# Altium PCB AEKISO60.PcbDoc (part 1 of 2)
Units mm, origin at the board's own origin, x right, y up, seen from the top; angles counter-clockwise.
Board outline 284.73 x 94.2 mm, 2 copper layers (Component Side, Bottom Layer), stack 1.571 mm thick; 190 components, 126 nets, 646 pads, 163 vias.
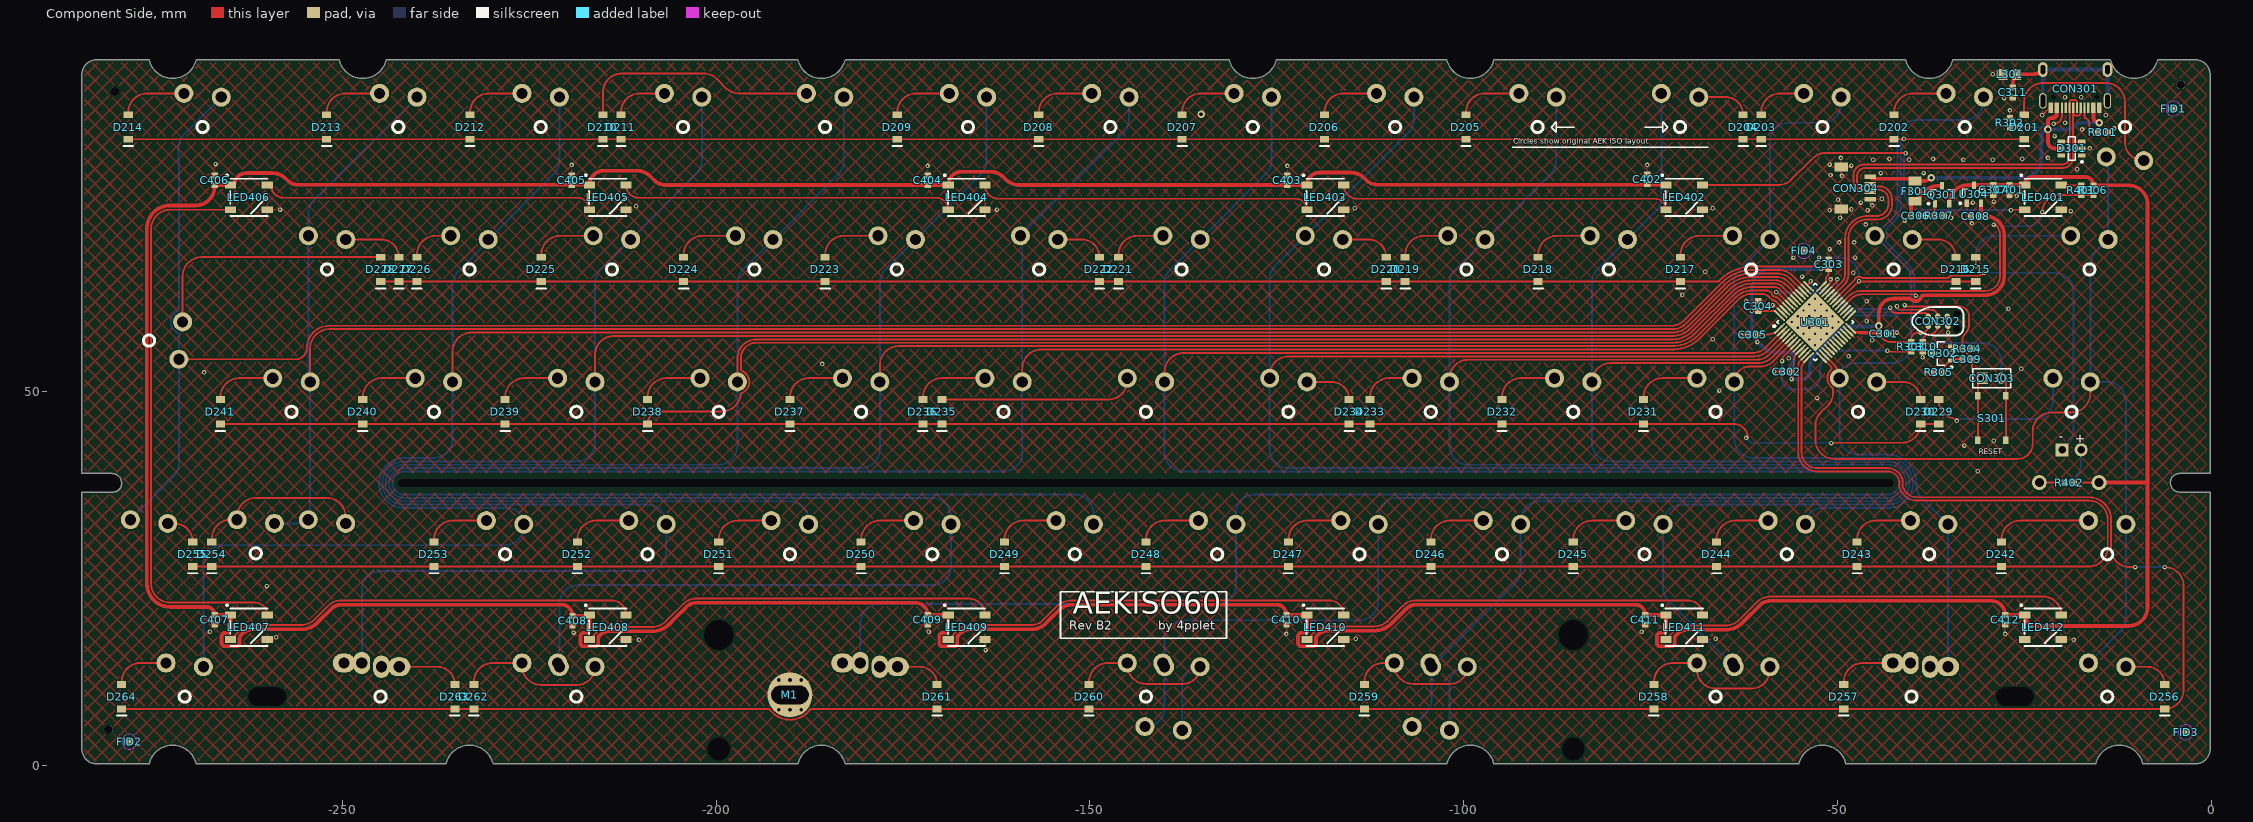
[diagram p0: Component Side view]
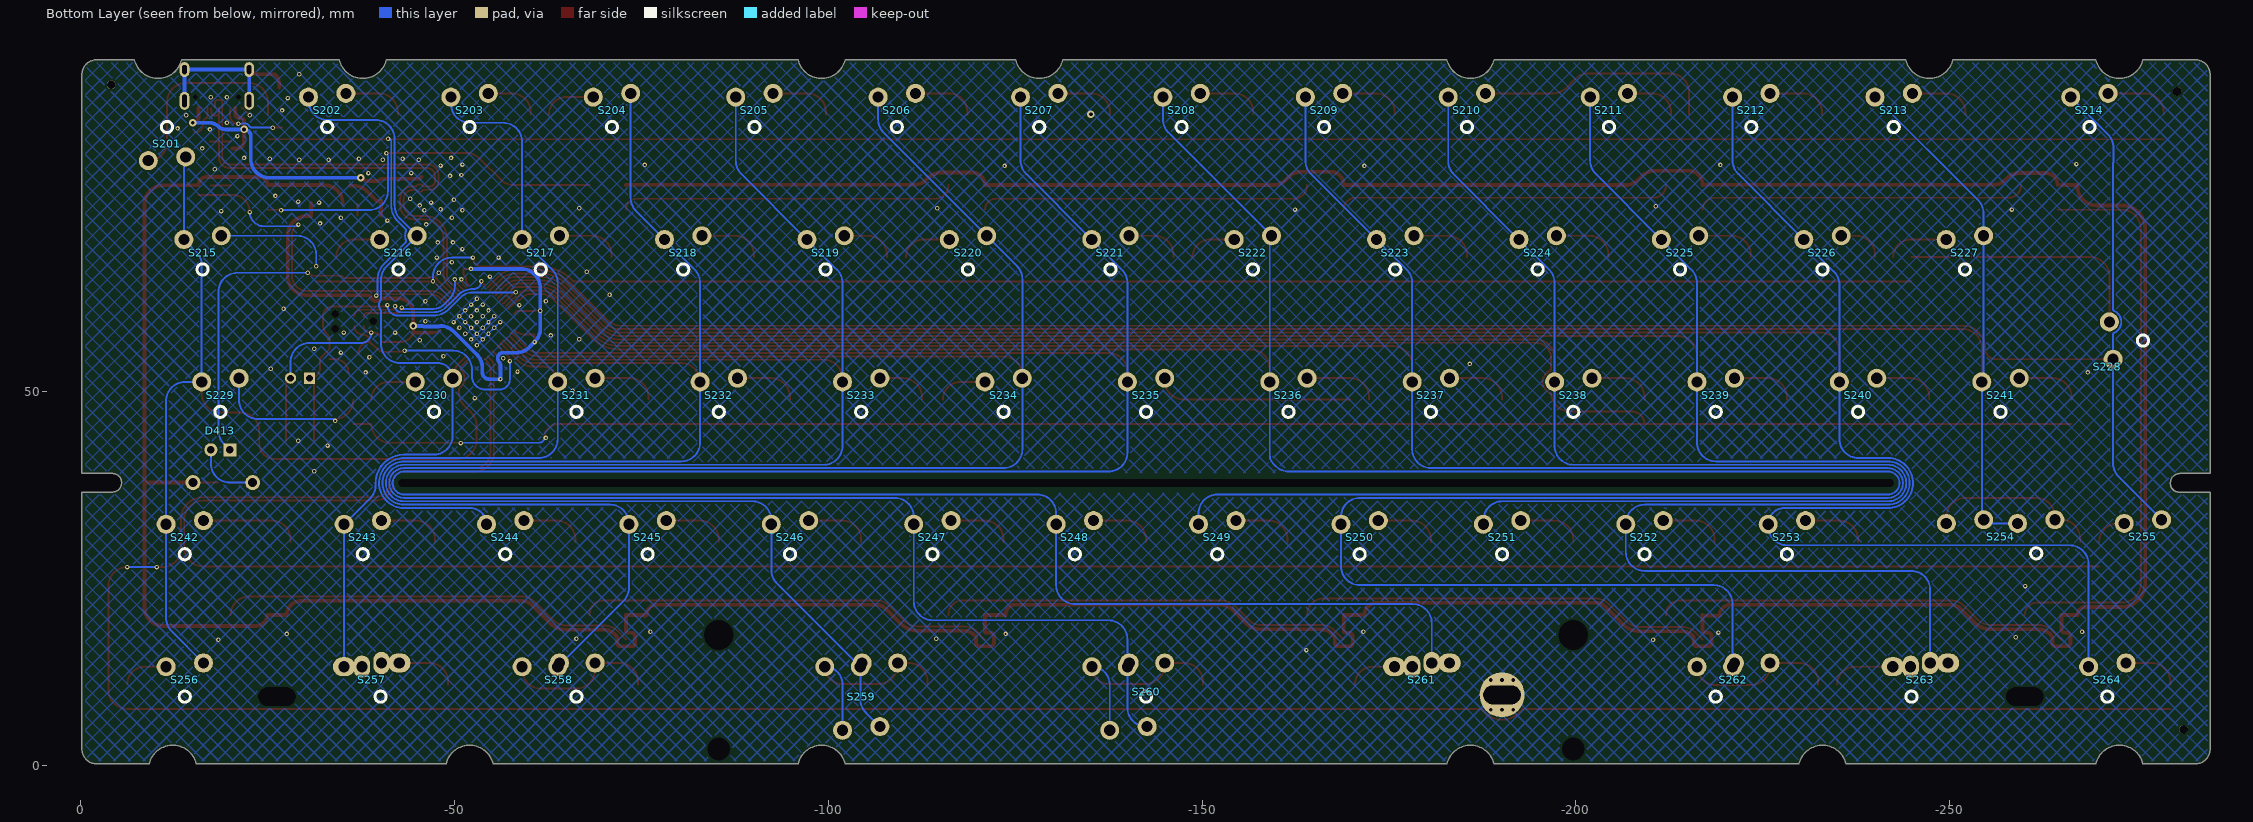
[diagram p1: Bottom Layer view, seen from below]
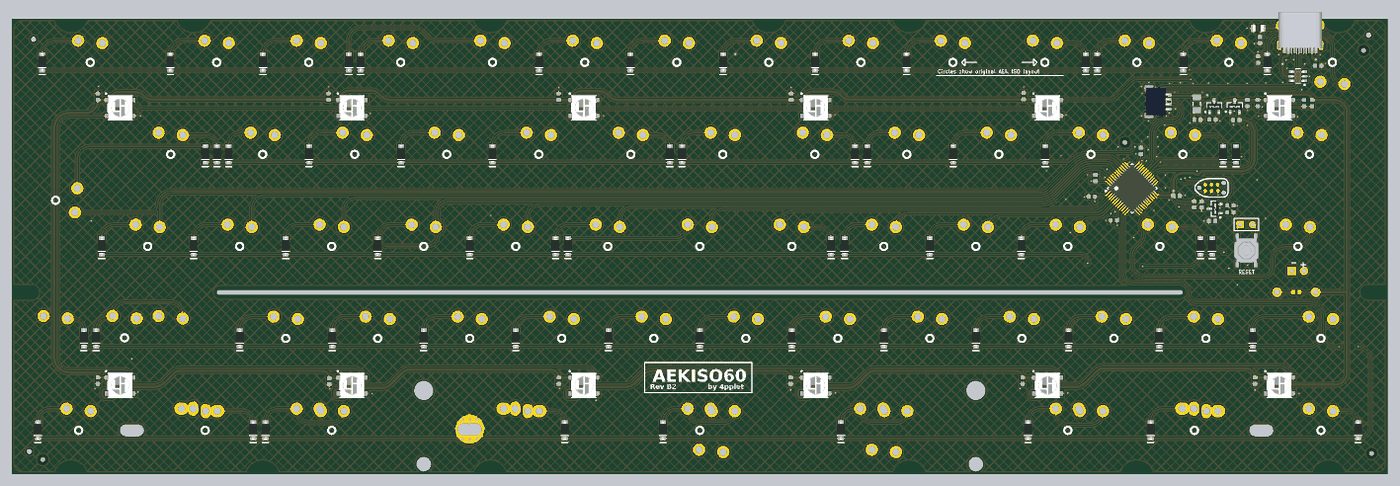
[diagram p3: 3D render of the assembled board from above, using the file's embedded part models]

## Layer stack, top to bottom
Top Solder: solder mask 0.0102, Solder Resist, Dk 3.5
Component Side: signal copper 0.0356
Dielectric 1: core 1.5, FR-4, Dk 4.2
Bottom Layer: signal copper 0.0356
Solder Side: solder mask 0.0102, Solder Resist, Dk 3.5

## Board outline
-284.85,2.215 ccw(c-282.85,2.215) -282.85,0.215 -275.85,0.215 cw(c-272.7,-0.52) -269.55,0.215 -236.137,0.215 cw(c-232.987,-0.52) -229.838,0.215 -189.05,0.215 cw(c-185.9,-0.52) -182.75,0.215 -102.25,0.215 cw(c-99.1,-0.52) -95.95,0.215 -55.161,0.215 cw(c-52.011,-0.52) -48.861,0.215 -15.45,0.215 cw(c-12.3,-0.52) -9.15,0.215 -2.15,0.215 ccw(c-2.15,2.215) -0.15,2.215 ccw(c-0.15,2.238) -0.127,2.238 -0.127,36.576 -4.191,36.576 cw(c-4.191,37.846) -5.461,37.846 cw(c-4.242,37.846) -4.242,39.065 -0.15,39.065 -0.15,92.415 ccw(c-2.15,92.415) -2.15,94.415 -7.177,94.415 cw(c-10.327,95.149) -13.477,94.415 -34.575,94.415 cw(c-37.724,95.149) -40.874,94.415 -95.95,94.415 cw(c-99.1,95.149) -102.25,94.415 -125.061,94.415 cw(c-128.211,95.149) -131.361,94.415 -182.75,94.415 cw(c-185.9,95.149) -189.05,94.415 -244.125,94.415 cw(c-247.274,95.149) -250.424,94.415 -269.55,94.415 cw(c-272.7,95.149) -275.85,94.415 -282.85,94.415 ccw(c-282.85,92.415) -284.85,92.415 -284.85,39.065 -280.797,39.065 cw(c-280.797,37.795) -279.527,37.795 -279.527,37.719 cw(c-280.67,37.719) -280.67,36.576 -284.861,36.576 -284.85,36.565

## Design rules (kind name [scope] priority, off if disabled: settings)
BoardOutlineClearance [All] p1: gap=0.254 ignorepadtopadclearanceinfootprint=FALSE except(0: Arc-SplitContinuation Track-SplitContinuation SMDPad-SplitContinuation THPad-SplitContinuation Via-SplitContinuation Fill-SplitContinuation Poly-SplitContinuation Region-SplitContinuation Text-SplitContinuation)
Clearance [All] p1: gap=0.2 ignorepadtopadclearanceinfootprint=FALSE except(0: Arc-Hole Track-Hole SMDPad-Hole THPad-Hole Via-Hole Fill-Hole Poly-Hole Region-Hole Text-Hole; 0.254: THPad-THPad THPad-Via THPad-Fill THPad-Poly THPad-Region THPad-Text Via-Via Via-Fill Via-Poly Via-Region Via-Text Fill-Fill Fill-Poly Fill-Region Fill-Text Poly-Poly Poly-Region Poly-Text Region-Region Region-Text Text-Text)
ComponentClearance [InComponent('No Component') And OnLayer('Component Side')] p1: gap=0.254 collisioncheckmode=3 verticalgap=0.254 showdistances=FALSE
DiffPairsRouting DiffPairsRouting_USB [InDifferentialPairClass('All Differential Pairs')] p1: maxlimit=0.254 minlimit=0.203 mostfreqgap=0.203 toplayer_minwidth=0.152 toplayer_maxwidth=0.381 toplayer_prefwidth=0.152 bottomlayer_minwidth=0.152 bottomlayer_maxwidth=0.381 bottomlayer_prefwidth=0.152 maxuncoupledlength=12.7
DiffPairsRouting [All] p2: maxlimit=0.254 minlimit=0.254 mostfreqgap=0.254 toplayer_minwidth=0.381 toplayer_maxwidth=0.381 toplayer_prefwidth=0.381 bottomlayer_minwidth=0.381 bottomlayer_maxwidth=0.381 bottomlayer_prefwidth=0.381 maxuncoupledlength=12.7
HoleSize [All] p1: absolutevalues=TRUE maxlimit=20 minlimit=0.025 maxpercent=80.000 minpercent=20.000
MatchedLengths MatchedLengths_USB_DiffPairs_1 [All] p1: tolerance=0.127 checknetsindiffpair=TRUE checkdiffpairvsdiffpair=FALSE checkxsignals=FALSE checkothers=FALSE
MatchedLengths MatchedLengths_USB_DiffPairs [All] p2: tolerance=0.127 checknetsindiffpair=TRUE checkdiffpairvsdiffpair=FALSE checkxsignals=FALSE checkothers=FALSE
PolygonConnect PolygonConnect_1 [All vs IsVia] p1: connectstyle=Direct reliefconductorwidth=0.254 reliefentries=4 polygonreliefangle="90 Angle" airgapwidth=0.254
PolygonConnect [All] p2: connectstyle=Relief reliefconductorwidth=0.254 reliefentries=4 polygonreliefangle="90 Angle" airgapwidth=0.254
RoutingVias [All] p1: holewidth=0.711 width=1.27 viastyle="Through Hole" minholewidth=0.711 minwidth=1.27 maxholewidth=0.711 maxwidth=1.27
SolderMaskExpansion [All] p1: expansion=0.102 istentingtop=FALSE
Width [All] p1: maxlimit=1 minlimit=0.203 preferedwidth=0.254 minimp=50.000000 maximp=50.000000 favimp=50.000000
27 further rules are at their usual default settings.

## Classes and differential pairs
component class Designator: C201 C202 C203 C204 C205 C206 D201 D202 D203 D204 D205 D206 D207 D208 D209 D210 D211 D212 D213 D214 D215 D216 D217 D218 D219 D220 D221 D222 D223 D224 D225 D226 D227 D228 D229 D230 D231 D232 D233 D234 D235 D236 D237 D238 D239 D240 D241 D242 D243 D244 D245 D246 D247 D248 D249 D250 D251 D252 D253 D254 D255 D256 D257 D258 D259 D260 D261 D262 D263 D264 D268 S201 S202 S203 S204 S205 S206 S207 S208 S209 S210 S211 S212 S213 S214 S215 S216 S217 S218 S219 S220 S221 S222 S223 S224 S225 S226 S227 S228 S229 S230 S231 S232 S233 S234 S235 S236 S237 S238 S239 S240 S241 S242 S243 S244 S245 S246 S247 S248 S249 S250 S251 S252 S253 S254 S255 S256 S257 S258 S259 S260 S261 S262 S263 S264 S271
differential pair D: +D_P -D_N

## Components (designator, comment, footprint, x,y, rotation, side; value= is the part's Value field where it differs from the comment)
C301 "" C0603[1608] -43.815,57.785 r180 top value=0.1uF
C302 "" C0603[1608] -56.769,52.705 r0 top value=0.1uF
C303 "" C0603[1608] -51.181,67.071 r270 top value=0.1uF
C304 "" C0603[1608] -60.579,61.468 r270 top value=0.1uF
C305 "" C0603[1608] -61.341,57.658 r0 top value=0.1uF
C306 "" C0603[1608] -39.497,73.533 r180 top value=4.7uF
C307 "" C0603[1608] -29.14,76.99 r90 top value=1uF
C308 "" C0603[1608] -31.468,73.491 r0 top value=0.1uF
C309 "" C0603[1608] -32.639,54.356 r180 top value=4.7uF
C310 "" C0603[1608] -38.608,56.007 r270 top value=470nF
C311 "" C0603[1608] -26.543,90.043 r90 top value=0.1uF
C401 "" C0603[1608] -26.981,76.99 r90 top value=0.1uF
C402 "" C0603[1608] -75.443,78.43 r270 top value=0.1uF
C403 "" C0603[1608] -123.576,78.303 r270 top value=0.1uF
C404 "" C0603[1608] -171.709,78.303 r270 top value=0.1uF
C405 "" C0603[1608] -219.334,78.303 r270 top value=0.1uF
C406 "" C0603[1608] -267.086,78.303 r270 top value=0.1uF
C407 "" C0603[1608] -267.086,19.502 r90 top value=0.1uF
C408 "" C0603[1608] -219.207,19.375 r90 top value=0.1uF
C409 "" C0603[1608] -171.709,19.502 r90 top value=0.1uF
C410 "" C0603[1608] -123.703,19.502 r90 top value=0.1uF
C411 "" C0603[1608] -75.697,19.502 r90 top value=0.1uF
C412 "" C0603[1608] -27.564,19.502 r90 top value=0.1uF
CON301 "TYPE-C-31-M-12" TYPE-C-31-M-12 -18.2,88 r180 top locked
CON302 "TC2030-IDC" TC2030-IDC-NL -36.576,59.436 r0 top locked
CON303 "Header 2" HDR1X2 -30.607,51.816 r0 top
CON304 "Header 5" "JST SM04B-SRSS-TB" -49.5,77.25 r270 top
D201 "Diode" SOD-123 -25.019,85.415 r90 top
D202 "Diode" SOD-123 -42.418,85.415 r90 top
D203 "Diode" SOD-123 -60.198,85.415 r90 top
D204 "Diode" SOD-123 -62.611,85.415 r90 top
D205 "Diode" SOD-123 -99.695,85.415 r90 top
D206 "Diode" SOD-123 -118.618,85.415 r90 top
D207 "Diode" SOD-123 -137.668,85.415 r90 top
D208 "Diode" SOD-123 -156.845,85.415 r90 top
D209 "Diode" SOD-123 -175.768,85.415 r90 top
D210 "Diode" SOD-123 -215.138,85.415 r90 top
D211 "Diode" SOD-123 -212.725,85.415 r90 top
D212 "Diode" SOD-123 -232.918,85.415 r90 top
D213 "Diode" SOD-123 -252.095,85.415 r90 top
D214 "Diode" SOD-123 -278.638,85.415 r90 top
D215 "Diode" SOD-123 -31.496,66.365 r90 top
D216 "Diode" SOD-123 -34.163,66.365 r90 top
D217 "Diode" SOD-123 -70.993,66.365 r90 top
D218 "Diode" SOD-123 -90.043,66.365 r90 top
D219 "Diode" SOD-123 -107.823,66.365 r90 top
D220 "Diode" SOD-123 -110.363,66.365 r90 top
D221 "Diode" SOD-123 -146.177,66.365 r90 top
D222 "Diode" SOD-123 -148.717,66.365 r90 top
D223 "Diode" SOD-123 -185.42,66.365 r90 top
D224 "Diode" SOD-123 -204.343,66.365 r90 top
D225 "Diode" SOD-123 -223.393,66.365 r90 top
D226 "Diode" SOD-123 -240.03,66.365 r90 top
D227 "Diode" SOD-123 -242.443,66.365 r90 top
D228 "Diode" SOD-123 -244.856,66.365 r90 top
D229 "Diode" SOD-123 -36.449,47.315 r90 top
D230 "Diode" SOD-123 -38.862,47.315 r90 top
D231 "Diode" SOD-123 -75.946,47.315 r90 top
D232 "Diode" SOD-123 -94.869,47.315 r90 top
D233 "Diode" SOD-123 -112.522,47.315 r90 top
D234 "Diode" SOD-123 -115.316,47.315 r90 top
D235 "Diode" SOD-123 -169.799,47.315 r90 top
D236 "Diode" SOD-123 -172.339,47.315 r90 top
D237 "Diode" SOD-123 -190.119,47.315 r90 top
D238 "Diode" SOD-123 -209.169,47.315 r90 top
D239 "Diode" SOD-123 -228.219,47.315 r90 top
D240 "Diode" SOD-123 -247.269,47.315 r90 top
D241 "Diode" SOD-123 -266.319,47.315 r90 top
D242 "Diode" SOD-123 -28.067,28.265 r90 top
D243 "Diode" SOD-123 -47.371,28.265 r90 top
D244 "Diode" SOD-123 -66.167,28.265 r90 top
D245 "Diode" SOD-123 -85.344,28.265 r90 top
D246 "Diode" SOD-123 -104.394,28.265 r90 top
D247 "Diode" SOD-123 -123.444,28.265 r90 top
D248 "Diode" SOD-123 -142.494,28.265 r90 top
D249 "Diode" SOD-123 -161.417,28.265 r90 top
D250 "Diode" SOD-123 -180.594,28.265 r90 top
D251 "Diode" SOD-123 -199.644,28.265 r90 top
D252 "Diode" SOD-123 -218.567,28.265 r90 top
D253 "Diode" SOD-123 -237.744,28.265 r90 top
D254 "Diode" SOD-123 -267.462,28.265 r90 top
D255 "Diode" SOD-123 -270.002,28.265 r90 top
D256 "Diode" SOD-123 -6.223,9.215 r90 top
D257 "Diode" SOD-123 -49.149,9.215 r90 top
D258 "Diode" SOD-123 -74.549,9.215 r90 top
D259 "Diode" SOD-123 -113.284,9.215 r90 top
D260 "Diode" SOD-123 -150.114,9.215 r90 top
D261 "Diode" SOD-123 -170.434,9.215 r90 top
D262 "Diode" SOD-123 -232.41,9.215 r90 top
D263 "Diode" SOD-123 -234.95,9.215 r90 top
D264 "Diode" SOD-123 -279.527,9.215 r90 top
D301 "SRV05" SOT-23-6 -18.669,82.55 r180 top
D413 "LED0" "SWITCH_LED - 1U" -18.675,47.315 r180 bottom
F301 "Fuse Thermal" C1206[3216] -39.624,76.835 r90 top
FID1 "Plug" FIDUCIAL_NORDIC -5.08,87.884 r270 top
FID2 "Plug" FIDUCIAL_NORDIC -278.511,3.175 r270 top
FID3 "Plug" FIDUCIAL_NORDIC -3.429,4.445 r270 top
FID4 "Plug" Fiducial_Nordic -54.483,68.834 r90 top
L301 "Inductor" L0805 -26.924,92.456 r0 top
LED401 "WS2812B" WS2812B -22.5,76 r0 top
LED402 "WS2812B" WS2812B -70.499,76 r0 top
LED403 "WS2812B" WS2812B -118.499,76 r0 top
LED404 "WS2812B" WS2812B -166.499,76 r0 top
LED405 "WS2812B" WS2812B -214.499,76 r0 top
LED406 "WS2812B" WS2812B -262.499,76 r0 top
LED407 "WS2812B" WS2812B -262.499,18.5 r0 top
LED408 "WS2812B" WS2812B -214.499,18.5 r0 top
LED409 "WS2812B" WS2812B -166.499,18.5 r0 top
LED410 "WS2812B" WS2812B -118.499,18.5 r0 top
LED411 "WS2812B" WS2812B -70.499,18.5 r0 top
LED412 "WS2812B" WS2812B -22.5,18.5 r0 top
M1 "Socket" mounting_hole -190.119,9.45 r0 top
Q301 "PMOS-2" SOT-23-3 -35.998,76.355 r90 top
Q302 "2N7002 NMOS" SOT-23-3 -35.941,55.118 r180 top
R301 "Res1" R0603[1608] -14.478,84.709 r0 top value=5k1
R302 "Res1" R0603[1608] -26.924,85.979 r90 top value=5k1
R303 "Res1" R0603[1608] -40.132,56.007 r270 top value=10K
R304 "Res1" R0603[1608] -32.639,55.753 r0 top value=10K
R305 "Res1" R0603[1608] -36.449,52.578 r180 top value=100K
R306 "Res1" R0603[1608] -15.748,76.962 r270 top value=10K
R307 "Res1" R0603[1608] -36.379,73.561 r0 top value=10K
R401 "Res1" R0603[1608] -17.399,76.962 r90 top value=470R
R402 "Res1" "R0603[1608] - THT" -19,37.846 r0 top value=470R
S201 "MX" "ALPS-switch - 1.25U - switched pol" -11.531,85.415 r0 bottom locked
S202 "MX" "Alps-switch - switched pol" -32.962,85.415 r180 bottom locked
S203 "MX" Alps-switch -52.012,85.415 r180 bottom locked
S204 "MX" Alps-switch -71.062,85.415 r180 bottom locked
S205 "MX" Alps-switch -90.112,85.415 r180 bottom locked
S206 "MX" "Alps-switch - switched pol" -109.162,85.415 r180 bottom locked
S207 "MX" Alps-switch -128.212,85.415 r180 bottom locked
S208 "MX" "Alps-switch - switched pol" -147.262,85.415 r180 bottom locked
S209 "MX" Alps-switch -166.312,85.415 r180 bottom locked
S210 "MX" "Alps-switch - switched pol" -185.42,85.415 r180 bottom locked
S211 "MX" Alps-switch -204.412,85.415 r180 bottom locked
S212 "MX" "Alps-switch - switched pol" -223.462,85.415 r180 bottom locked
S213 "MX" Alps-switch -242.512,85.415 r180 bottom locked
S214 "MX" "ALPS-switch - 1.25U - switched pol" -268.692,85.415 r180 bottom locked
S215 "MX" "ALPS-switch - 1.25U" -16.293,66.365 r180 bottom locked
S216 "MX" Alps-switch -42.487,66.365 r180 bottom locked
S217 "MX" Alps-switch -61.537,66.365 r180 bottom locked
S218 "MX" "Alps-switch - switched pol" -80.587,66.365 r180 bottom locked
S219 "MX" Alps-switch -99.637,66.365 r180 bottom locked
S220 "MX" Alps-switch -118.687,66.365 r180 bottom locked
S221 "MX" Alps-switch -137.737,66.365 r180 bottom locked
S222 "MX" Alps-switch -156.787,66.365 r180 bottom locked
S223 "MX" Alps-switch -175.837,66.365 r180 bottom locked
S224 "MX" "Alps-switch - switched pol" -194.887,66.365 r180 bottom locked
S225 "MX" Alps-switch -213.937,66.365 r180 bottom locked
S226 "MX" "Alps-switch - switched pol" -232.987,66.365 r180 bottom locked
S227 "MX" Alps-switch -252.037,66.365 r180 bottom locked
S228 "MX" "ALPS-SWITCH - ENTER - AEKISO" -263.95,47.315 r180 bottom locked
S229 "MX" "ALPS-switch - 2U - no stab" -18.675,47.315 r180 bottom locked
S230 "MX" Alps-switch -47.25,47.315 r180 bottom locked
S231 "MX" Alps-switch -66.3,47.315 r180 bottom locked
S232 "MX" "Alps-switch - switched pol" -85.35,47.315 r180 bottom locked
S233 "MX" Alps-switch -104.4,47.315 r180 bottom locked
S234 "MX" "Alps-switch - switched pol" -123.45,47.315 r180 bottom locked
S235 "MX" "Alps-switch - switched pol" -142.5,47.315 r180 bottom locked
S236 "MX" Alps-switch -161.55,47.315 r180 bottom locked
S237 "MX" "Alps-switch - switched pol" -180.6,47.315 r180 bottom locked
S238 "MX" "Alps-switch - switched pol" -199.65,47.315 r180 bottom locked
S239 "MX" Alps-switch -218.7,47.315 r180 bottom locked
S240 "MX" "Alps-switch - switched pol" -237.75,47.315 r180 bottom locked
S241 "MX" Alps-switch -256.8,47.315 r180 bottom locked
S242 "MX" "ALPS-switch - 1.5U" -13.912,28.265 r180 bottom
S243 "MX" "Alps-switch - switched pol" -37.725,28.265 r180 bottom locked
S244 "MX" "Alps-switch - switched pol" -56.775,28.265 r180 bottom locked
S245 "MX" Alps-switch -75.825,28.265 r180 bottom locked
S246 "MX" "Alps-switch - switched pol" -94.875,28.265 r180 bottom locked
S247 "MX" Alps-switch -113.925,28.265 r180 bottom locked
S248 "MX" "Alps-switch - switched pol" -132.975,28.265 r180 bottom locked
S249 "MX" "Alps-switch - switched pol" -152.025,28.265 r180 bottom locked
S250 "MX" "Alps-switch - switched pol" -171.075,28.265 r180 bottom locked
S251 "MX" "Alps-switch - switched pol" -190.125,28.265 r180 bottom locked
S252 "MX" "Alps-switch - switched pol" -209.175,28.265 r180 bottom locked
S253 "MX" Alps-switch -228.225,28.265 r180 bottom locked
S254 "MX" "ALPS-switch - AEKISO r_shift" -261.58,28.385 r180 bottom
S255 "MX" Alps-switch -275.85,28.385 r180 bottom locked
S256 "MX" "Alps-switch - switched pol" -13.912,9.215 r180 bottom locked
S257 "MX" "ALPS-switch - L_WIN - AEKISO60" -37.724,9.215 r180 bottom locked
S258 "MX" "ALPS-switch - L_alt - AEKISO60" -61.537,9.215 r180 bottom locked
S259 "MX" "ALPS-SWITCH - L SPLIT SPACE - AEKISO60" -102.018,9.215 r0 bottom locked
S260 "MX" "ALPS-SWITCH - SPACE - AEKISO60" -142.499,9.215 r180 bottom locked
S261 "MX" "ALPS-switch - R split space - AEKISO60" -163.931,9.215 r0 bottom locked
S262 "MX" "ALPS-switch - R_alt - AEKISO60" -223.462,9.215 r180 bottom locked
S263 "MX" "ALPS-SWITCH - R_WIN - AEKISO60" -247.274,9.215 r180 bottom locked
S264 "MX" "ALPS-switch - 1.25U - switched pol" -271.087,9.215 r180 bottom locked
S301 "SW-PB" "XKB Switch" -29.337,46.482 r270 top
U301 "STM32F072/F303_LQFP48" "STM32 - COMBO 7X7MM" -52.986,59.33 r45 top locked
U304 "XC6206P332MR" SOT-23-3 -31.75,76.397 r90 top

## Footprints (in the part's own frame and the unit in brackets; to place one, negate y for a bottom-side part, rotate by r counter-clockwise, add the part's x,y. Pads: shape width x height; smd on the part's side, far side on the other; paste and mask are expansions set on the pad)
Alps-switch [mm]
  round 2.54 hole 1.499 mask+0.102: 1(-2.5,4) 2(2.5,4.5)
  round 1 on Mech14: ""(0,0)
"ALPS-switch - 1.5U" [mm]
  round 2.54 hole 1.499 mask+0.102: 1(-2.5,4) 2(2.5,4.5)
  round 1 on Mech14: ""(0,0)
"ALPS-switch - 1.25U" [mm]
  round 2.54 hole 1.499 mask+0.102: 1(-2.5,4) 2(2.5,4.5)
  round 1 on Mech14: ""(0,0)
"ALPS-switch - 1.25U - switched pol" [mm]
  round 2.54 hole 1.499 mask+0.102: 1(2.5,4.5) 2(-2.5,4)
  round 1 on Mech14: ""(0,0)
"ALPS-switch - 2U - no stab" [mm]
  round 2.54 hole 1.499 mask+0.102: 1(-2.5,4) 2(2.5,4.5)
  round 1 on Mech14: ""(0,0)
"ALPS-switch - AEKISO r_shift" [mm]
  round 2.54 hole 1.499 mask+0.102: 1(-12.025,4) 1(2.5,4.5) 2(-7.025,4.5) 2(-2.5,4)
  round 1 on Mech14: ""(-9.525,0) ""(0,0)
"ALPS-SWITCH - ENTER - AEKISO" [mm]
  round 2.54 hole 1.499 mask+0.102: 1(7.411,12.03) 2(7.911,7.03)
  round 1 on Mech14: ""(0,0) ""(9.53,9.53) ""(11.911,9.53) ""(14.293,9.53)
"ALPS-SWITCH - L SPLIT SPACE - AEKISO60" [mm]
  round 2.54 hole 1.499 mask+0.102: 1(-4.881,4) 1(-2.5,-4.5) 1(-2.262,-4) 2(-7.263,-4.5) 2(0.119,4.5) 2(2.5,-4)
  round 1 on Mech14: ""(-4.763,0) ""(-2.381,0) ""(0,0)
"ALPS-switch - L_alt - AEKISO60" [mm]
  round 2.54 hole 1.499 mask+0.102: 1(-2.5,4) 1(7.263,4.5) 2(2.262,4) 2(2.5,4.5)
  round 1 on Mech14: ""(0,0) ""(4.763,0)
"ALPS-switch - L_WIN - AEKISO60" [mm]
  oval 3x2.54 hole 1.499 mask+0.102: 1(-2.5,4) 2(4.881,4.5)
  oval 2.2x3 hole 1.499 mask+0.102: 1(-0.119,4) 2(2.5,4.5)
  round 1 on Mech14: ""(0,0) ""(2.381,0)
"ALPS-switch - R split space - AEKISO60" [mm]
  oval 2.2x3 hole 1.499 mask+0.102: 1(-14.169,-4) 2(-16.788,-4.5)
  oval 3x2.54 hole 1.499 mask+0.102: 1(-11.787,-4) 2(-19.169,-4.5)
  round 1 on Mech14: ""(-16.669,0) ""(-14.287,0)
"ALPS-switch - R_alt - AEKISO60" [mm]
  round 2.54 hole 1.499 mask+0.102: 1(-7.263,4) 1(2.5,4.5) 2(-2.5,4) 2(-2.262,4.5)
  round 1 on Mech14: ""(-4.763,0) ""(0,0)
"ALPS-SWITCH - R_WIN - AEKISO60" [mm]
  oval 3x2.54 hole 1.499 mask+0.102: 1(-4.881,4) 2(2.5,4.5)
  oval 2.2x3 hole 1.499 mask+0.102: 1(-2.5,4) 2(0.119,4.5)
  round 1 on Mech14: ""(-2.381,0) ""(0,0)
"ALPS-SWITCH - SPACE - AEKISO60" [mil]
  round 100 hole 59 mask+4: 1(-98.43,157.48) 1(-88.48,177.17) 1(5.56,-157.48) 2(-285.33,157.48) 2(-191.29,-177.17) 2(98.43,177.17)
  round 60 hole 120 unplated: ""(-2250,-275) ""(2250,-275)
  round 60 hole 157.01 unplated: ""(-2250,325) ""(2250,325)
  round 39.37 on Mech14: ""(-186.91,0) ""(-92.86,0) ""(0,0)
"Alps-switch - switched pol" [mm]
  round 2.54 hole 1.499 mask+0.102: 1(2.5,4.5) 2(-2.5,4)
  round 1 on Mech14: ""(0,0)
C0603[1608] [mm] "Chip Resistor, 2-Leads, Body 1,57x0,80mm, IPC Medium Density"
  rect 0.8x0.85 smd: 1(-0.65,0) 2(0.65,0)
  body extent -0.83,-0.43 0.82,0.43, height 0.5
C1206[3216] [mm]
  rect 1.2x1.8 smd: 1(-1.35,0) 2(1.35,0)
  silkscreen extent -0.35,-0.8 0.35,0.8, body extent -1.6,-0.9 1.6,0.9, height 1.2
FIDUCIAL_NORDIC [mm]
  round 1 smd paste+0 mask+0.5: 0(0,0)
  Component Side keep-out circle w0.01: c0,0 r1
Fiducial_Nordic [mm]
  round 1 smd paste+0 mask+0.5: 0(0,0)
  Component Side keep-out circle w0.01: c0,0 r1
HDR1X2 [mm] "Connector; Header; 2 Position"
  rect 1.5x1.5 hole 0.9 mask+0.102: 1(0,0)
  round 1.5 hole 0.9 mask+0.102: 2(2.54,0)
  silkscreen extent -1.27,-1.27 3.81,1.27
"JST SM04B-SRSS-TB" [mm]
  rect 0.6x1.55 smd: 1(-1.5,3.875) 2(-0.5,3.875) 3(0.5,3.875) 4(1.5,3.875)
  rect 1.2x1.8 smd: 5(-2.8,0) 5(2.8,0)
  body extent -3.01,-0.76 2.99,4.19, height 2.96
L0805 [mm] "based on Sunlord-GZ2012D101TF_C1015 datasheet"
  rect 1.16x1.47 smd: 1(-0.92,0) 2(0.92,0)
  body extent -1.15,-0.72 1.15,0.72, height 1.02
mounting_hole [mm]
  round 1 hole 0.5 paste+0 mask+0: 1(-1.5,-2) 1(-1.5,2) 1(0,-2) 1(0,2) 1(1.5,-2) 1(1.5,2)
  round 6 hole 2.5 slot 5 at 0 deg: 1(0,0)
R0603[1608] [mm] "Chip Resistor, 2-Leads, Body 1,57x0,80mm, IPC Medium Density"
  rect 0.8x0.85 smd: 1(-0.65,0) 2(0.65,0)
  body extent -0.83,-0.43 0.82,0.43, height 0.5
"R0603[1608] - THT" [mm] "Chip Resistor, 2-Leads, Body 1,57x0,80mm, IPC Medium Density"
  round 2 hole 1.2: 1(-4,0) 2(4,0)
  rect 0.8x0.85 smd paste-6: 1(-0.65,0) 2(0.65,0)
SOD-123 [mm]
  rect 0.91x1.22 smd: 1(1.635,0) 2(-1.635,0)
  silkscreen extent -2.54,-0.64 -2.54,0.63, body extent -1.87,-0.85 1.88,0.85, height 1.2
SOT-23-3 [mm] "3.3v regulator, used in Windsond S2 proto 1"
  rect 1x0.55 smd: 1(-1.2,0.95) 2(-1.2,-0.95) 3(1.2,0)
  silkscreen extent -1.32,-1.55 0.7,1.95, body extent -1.45,-1.5 1.1,1.5, height 1
SOT-23-6 [mm]
  rect 1x0.55 smd: 1(-1.375,0.95) 2(-1.375,0) 3(-1.375,-0.95) 4(1.375,-0.95) 5(1.375,0) 6(1.375,0.95)
  silkscreen extent -1.5,-1.55 0.46,1.92, body extent -1.37,-1.44 1.47,1.49, height 1.05
"STM32 - COMBO 7X7MM" [mm] "LQFP48, 7x7mm"
  oval 1.45x0.3 smd paste-5: 1(-4.225,2.75) 2(-4.225,2.25) 3(-4.225,1.75) 4(-4.225,1.25) 5(-4.225,0.75) 6(-4.225,0.25) 7(-4.225,-0.25) 8(-4.225,-0.75) 9(-4.225,-1.25) 10(-4.225,-1.75) 11(-4.225,-2.25) 12(-4.225,-2.75) 25(4.225,-2.75) 26(4.225,-2.25) 27(4.225,-1.75) 28(4.225,-1.25) 29(4.225,-0.75) 30(4.225,-0.25) 31(4.225,0.25) 32(4.225,0.75) 33(4.225,1.25) 34(4.225,1.75) 35(4.225,2.25) 36(4.225,2.75)
  oval 0.8x0.25 smd: 1(-3.4,2.75) 2(-3.4,2.25) 3(-3.4,1.75) 4(-3.4,1.25) 5(-3.4,0.75) 6(-3.4,0.25) 7(-3.4,-0.25) 8(-3.4,-0.75) 9(-3.4,-1.25) 10(-3.4,-1.75) 11(-3.4,-2.25) 12(-3.4,-2.75) 25(3.4,-2.75) 26(3.4,-2.25) 27(3.4,-1.75) 28(3.4,-1.25) 29(3.4,-0.75) 30(3.4,-0.25) 31(3.4,0.25) 32(3.4,0.75) 33(3.4,1.25) 34(3.4,1.75) 35(3.4,2.25) 36(3.4,2.75)
  oval 0.25x0.8 smd: 13(-2.75,-3.4) 14(-2.25,-3.4) 15(-1.75,-3.4) 16(-1.25,-3.4) 17(-0.75,-3.4) 18(-0.25,-3.4) 19(0.25,-3.4) 20(0.75,-3.4) 21(1.25,-3.4) 22(1.75,-3.4) 23(2.25,-3.4) 24(2.75,-3.4) 37(2.75,3.4) 38(2.25,3.4) 39(1.75,3.4) 40(1.25,3.4) 41(0.75,3.4) 42(0.25,3.4) 43(-0.25,3.4) 44(-0.75,3.4) 45(-1.25,3.4) 46(-1.75,3.4) 47(-2.25,3.4) 48(-2.75,3.4)
  oval 0.3x1.45 smd paste-5: 13(-2.75,-4.225) 14(-2.25,-4.225) 15(-1.75,-4.225) 16(-1.25,-4.225) 17(-0.75,-4.225) 18(-0.25,-4.225) 19(0.25,-4.225) 20(0.75,-4.225) 21(1.25,-4.225) 22(1.75,-4.225) 23(2.25,-4.225) 24(2.75,-4.225) 37(2.75,4.225) 38(2.25,4.225) 39(1.75,4.225) 40(1.25,4.225) 41(0.75,4.225) 42(0.25,4.225) 43(-0.25,4.225) 44(-0.75,4.225) 45(-1.25,4.225) 46(-1.75,4.225) 47(-2.25,4.225) 48(-2.75,4.225)
  rect 5.6x5.6 smd: 47(0,0)
  silkscreen extent -4.43,-3.65 3.65,3.65, body extent -3.52,-3.52 3.52,3.52, height 0.5
"SWITCH_LED - 1U" [mm]
  round 1.75 hole 1 mask+0.102: 1(-1.27,-5.08)
  rect 1.75x1.75 hole 1 mask+0.102: 2(1.27,-5.08)
  round 1 on Mech14: ""(0,0)
TC2030-IDC-NL [mm] "Tag-Connect 6-Pin with No Legs (PN# TC2030-IDC-NL)"
  round 0.9 hole 0.995 unplated: 0(-2.54,0) 0(2.54,-1.016) 0(2.54,1.016)
  round 0.79 smd paste-0.39: 1(-1.27,-0.635) 2(-1.27,0.635) 3(0,-0.635) 4(0,0.635) 5(1.35,-0.635) 6(1.27,0.635)
  silkscreen extent -3.43,-1.91 3.43,1.9
TYPE-C-31-M-12 [mm]
  rect 0.6x1.45 smd: A1B12(-3.25,0) A4B9(-2.45,0) B1A12(3.25,0) B4A9(2.45,0)
  rect 0.3x1.45 smd: A5(-1.25,0) A6(-0.25,0) A7(0.25,0) A8(1.25,0) B5(1.75,0) B6(0.75,0) B7(-0.75,0) B8(-1.75,0)
  oval 1x2.1 / inner oval 1.3x2.4 / far side oval 1.3x2.4 hole 0.6 slot 1.7 at 90 deg: S1(-4.32,-0.915) S1(4.32,-0.915)
  oval 1.3x2 hole 0.6 slot 1.2 at 90 deg: S1(-4.32,-5.095) S1(4.32,-5.095)
  round 0 hole 0.65 unplated: ""(-2.89,-1.445) ""(2.89,-1.445)
  body extent -4.47,-7.72 4.47,0.18, height 3.21
WS2812B [mm]
  rect 1.5x0.9 smd: 1(-2.45,1.65) 2(-2.45,-1.65) 3(2.45,-1.65) 4(2.45,1.65)
  silkscreen extent -3.05,-2.5 2.5,3.07, body extent -2.65,-2.45 2.7,2.5, height 1.5
"XKB Switch" [mm] "XKB Enterprise TS-1187A-C-D-B"
  rect 1x0.75 smd: 1(-3,1.875) 1(3,1.875) 2(-3,-1.875) 2(3,-1.875)
  body extent -3.25,-2.55 3.25,2.55, height 2

## Part data
C301 C302 C303 C304 C305 C308 C311 C401 C402 C403 C404 C405 C406 C407 C408 C409 C410 C411 C412: library part Cap, "Capacitor", LCSC MFG=YAGEO, LCSC Part #=C14663, MRF.Part=CC0603KRX7R9BB104, Version="0603 imperial"
C306 C309: library part Cap, "Capacitor", LCSC MFG="Samsung Electro-Mechanics", LCSC Part #=C19666, MRF.Part=CL10A475KO8NNNC, Version="0603 imperial"
C307: library part Cap, "Capacitor", LCSC MFG="Samsung Electro-Mechanics", LCSC Part #=C15849, MRF.Part=CL10A105KB8NNNC, Version="0603 imperial"
C310: library part Cap, "Capacitor", LCSC MFG="Samsung Electro-Mechanics", LCSC Part #=C1623, MRF.Part=CL10B474KA8NNNC, Version="0603 imperial"
CON301: LCSC MFG="Korean Hroparts Elec", LCSC Part #=C165948, MRF.Part=TYPE-C-31-M-12
CON302: library part "Header 3X2", "Header, 3-Pin, Dual row"
CON303: "Header, 2-Pin"
CON304: "JST for USB daughter board", LCSC MFG="JST Sales America", LCSC Part #=C160404, MRF.Part=SM04B-SRSS-TB(LF)(SN)
D201 D202 D203 D204 D205 D206 D207 D208 D209 D210 D211 D212 D213 D214 D215 D216 D217 D218 D219 D220 D221 D222 D223 D224 D225 D226 D227 D228 D229 D230 D231 D232 D233 D234 D235 D236 D237 D238 D239 D240 D241 D242 D243 D244 D245 D246 D247 D248 D249 D250 D251 D252 D253 D254 D255 D256 D257 D258 D259 D260 D261 D262 D263 D264: "Default Diode", LCSC MFG=ST(Semtech), LCSC Part #=C81598, MRF.Part=1N4148W, Version=SOD-123
D301: LCSC MFG="ProTek Devices", LCSC Part #=C85364, MRF.Part=SRV05-4-P-T7
D413: "Typical INFRARED GaAs LED"
F301: "Thermal Fuse", LCSC MFG="Shenzhen JDT Fuse", LCSC Part #=C135338, MRF.Part=ASMD1206-050
L301: LCSC MFG=Sunlord, LCSC Part #=C1015, MRF.Part=GZ2012D101TF, Version="0806 imperial"
LED401 LED402 LED403 LED404 LED405 LED406 LED407 LED408 LED409 LED410 LED411 LED412: LCSC MFG=Worldsemi, LCSC Part #=C2920042, MRF.Part=WS2812E-V5
Q301: "P-Channel Power MOSFET", LCSC MFG="Vishay Intertech", LCSC Part #=C10487, MRF.Part=SI2301CDS-T1-GE3, Version=SOT23-3
Q302: library part MOSFET-N, "N-Channel MOSFET", LCSC MFG="Changjiang Electronics Tech (CJ)", LCSC Part #=C8545, MRF.Part=2N7002
R301 R302: "Resistor", LCSC MFG="Uniroyal Elec", LCSC Part #=C23186, MRF.Part=0603WAF5101T5E, Version="0603 imperial"
R303 R304 R306 R307: "Resistor", LCSC MFG="Uniroyal Elec", LCSC Part #=C25804, MRF.Part=0603WAF1002T5E, Version="0603 imperial"
R305: "Resistor", LCSC MFG="Uniroyal Elec", LCSC Part #=C25803, MRF.Part=0603WAF1003T5E, Version="0603 imperial"
R401 R402: "Resistor", LCSC MFG="UNI-ROYAL(Uniroyal Elec)", LCSC Part #=C23179, MRF.Part=0603WAF4700T5E, Version="0603 imperial"
S201 S202 S203 S204 S205 S206 S207 S208 S209 S210 S211 S212 S213 S214 S216 S217 S218 S219 S220 S221 S222 S223 S224 S225 S226 S227 S228 S229 S230 S231 S232 S233 S234 S235 S236 S237 S238 S239 S240 S241 S242 S243 S244 S245 S246 S247 S248 S249 S250 S251 S252 S253 S254 S255 S256 S257 S258 S259 S260 S261 S262 S263 S264: library part SW-PB, "Switch"
S215: library part SW-PB, "TAB"
S301: "Switch", LCSC MFG="XKB Enterprise", LCSC Part #=C318888, MRF.Part=TS-1187A-C-D-B
U301: LCSC MFG=Geehy, LCSC Part #=C915660, MRF.Part=APM32F072CBT6
U304: library part "SOT23 LDO", LCSC MFG="Torex Semicon", LCSC Part #=C5446, MRF.Part=XC6206P332MR

## Free pads (board coordinates)
  round 1.152 hole 1.152 unplated paste+0.148 mask+0.148: ""(-281.305,4.826) ""(-280.416,90.17) ""(-4.064,91.059)
  round 0 hole 2.5 slot 5 at 0 deg unplated: ""(-260.05,9.215) ""(-26.25,9.215)
  round 0 hole 1 slot 200 at 0 deg unplated mask+0.15: ""(-142.5,37.79)

## Via types
v1: diameter 0.6, hole 0.3, Component Side to Bottom Layer, tented both sides, 133 vias
v2: diameter 0.6, hole 0.3, Component Side to Bottom Layer, tented bottom, 25 vias
v3: diameter 1, hole 0.5, Component Side to Bottom Layer, tented both sides, 5 vias

## Nets (pads, with @x,y where several pads share a name; then routed paths per layer and width w, separated by ;. In a path a pad name is that pad's centre, name@x,y a point inside that pad or via, vN(x,y) a via of type N, cw(c..) or ccw(c..) an arc to the next point about the centre after c; other vN are vias at no path point)
BOOT0: C309.1 CON303.1 R304.1 S301.2 U301.44 | length 49
  Component Side w0.254: v1@-57.954,63.237 U301.44@-56.504,61.787 ; v1(-41.021,61.595) -40.94,61.595 -40.767,61.422 -33.736,61.422 cw(c-33.736,60.071) -32.385,60.071 -32.385,59.011 cw(c-34.119,59.011) -32.893,57.785 ccw(c-31.937,56.829) -33.289,56.829 R304.1@-33.289,55.753 -33.016,55.455 -32.262,54.654 C309.1@-31.989,54.356 -31.989,53.198 ccw(c-30.607,53.198) CON303.1@-30.607,51.816 -31.212,51.211 S301.2@-31.212,49.482 S301.2@-31.212,43.482
  Bottom Layer w0.254: v1(-58.199,63.303) -52.471,63.303 cw(c-52.471,60.94) -50.801,62.612 cw(c-52.471,60.94) -50.8,62.611 -49.911,61.722 -49.651,61.462 cw(c-49.83,61.282) -49.649,61.46 -49.213,61.024 ccw(c-47.171,63.065) -49.21,61.021 ccw(c-47.171,63.065) -47.171,60.178 -42.38,60.178 ccw(c-42.38,60.632) -42.31,60.183 cw(c-42.271,59.932) -42.297,60.185 ccw(c-42.438,61.595) -42.165,60.204 ccw(c-42.438,61.595) v1(-41.021,61.595)
D_N: CON301.A7 CON301.B7 CON304.2 D301.3 U301.32 | length 65.4
  Component Side w0.254: U301.32@-50.529,62.848 -50.529,62.86 -50.099,63.29 -50.099,63.308 -49.146,64.261 ccw(c-50.672,65.787) -49.145,64.262 ccw(c-50.672,65.787) -48.514,65.787 -48.514,70.522 cw(c-45.974,70.522) -48.489,70.88 cw(c-45.974,70.522) -46.331,73.037 cw(c-45.974,70.522) -45.974,73.062 -44.602,73.062 ccw(c-44.602,74.942) -42.723,74.942 -42.723,75.792 ccw(c-44.41,75.792) -42.822,76.362 ccw(c-44.41,75.792) -43.84,77.379 ccw(c-44.41,75.792) -44.41,77.479 -44.879,77.479 -45.15,77.75 CON304.2@-45.625,77.75 cw(c-45.896,77.75) -45.896,77.479 -46.736,77.479 cw(c-46.736,78.114) -47.371,78.114 -47.371,78.867 cw(c-46.304,78.867) -46.304,79.934 -19.939,79.934 ccw(c-19.939,81.401) -18.471,81.401 -18.471,83.439 ; CON301.B7@-17.427,87.884 -17.473,87.402 -17.473,87.275 cw(c-17.8,87.275) -17.8,86.948 -18.1,86.948 cw(c-18.1,87.275) -18.427,87.275 -18.427,87.402 CON301.A7@-18.45,88 ccw(c-18.45,87.979) -18.471,87.979 -18.471,83.439 ; D301.3@-17.294,83.5 -18.324,83.5 ccw(c-18.324,83.292) -18.471,83.439
D_P: CON301.A6 CON301.B6 CON304.3 D301.4 U301.33 | length 65
  Component Side w0.254: U301.33@-50.882,63.201 -50.87,63.201 -50.44,63.631 -50.422,63.631 -49.47,64.583 ; -49.469,64.584 ccw(c-50.675,65.788) -48.971,65.788 -48.971,70.522 cw(c-45.974,70.522) -48.915,71.1 cw(c-45.974,70.522) -46.552,73.463 cw(c-45.974,70.522) -45.974,73.52 -44.792,73.52 ccw(c-44.792,75.131) -43.18,75.131 -43.18,75.698 ccw(c-44.503,75.698) -43.261,76.154 ccw(c-44.503,75.698) -44.047,76.94 ccw(c-44.503,75.698) -44.503,77.021 -44.879,77.021 -45.15,76.75 CON304.3@-45.625,76.75 ccw(c-45.896,76.75) -45.896,77.021 -46.736,77.021 cw(c-46.736,78.114) -47.828,78.114 -47.828,79.056 cw(c-46.494,79.056) -46.494,80.391 -19.939,80.391 ccw(c-19.939,81.401) -18.929,81.401 -18.929,83.566 ; D301.4@-20.044,83.5 -19.088,83.5 ccw(c-19.088,83.725) -18.929,83.566 ; CON301.A6@-17.95,88 -17.973,88.598 -17.973,88.725 ccw(c-18.3,88.725) -18.3,89.052 -18.6,89.052 ccw(c-18.6,88.725) -18.927,88.725 -18.927,88.104 CON301.B6@-18.95,88 cw(c-18.95,87.979) -18.929,87.979 -18.929,83.566
GND: C301.1 C302.1 C303.1 C304.1 C305.1 C306.1 C307.1 C308.1 C310.2 C311.1 C401.1 C402.1 C403.1 C404.1 C405.1 C406.1 C407.1 C408.1 C409.1 C410.1 C411.1 C412.1 CON301.A1B12 CON301.B1A12 CON302.5 CON304.4 CON304.5 D301.2 L301.1 LED401.3 LED402.3 LED403.3 LED404.3 LED405.3 LED406.3 LED407.3 LED408.3 LED409.3 LED410.3 LED411.3 LED412.3 M1.1 Q302.2 R301.2 R302.2 R304.2 R305.2 R307.2 U301.8 U301.23 U301.35 U301.47 U304.1 | length 20.5
  Component Side w0.203: U301.35@-51.589,63.908 -51.247,64.251 ccw(c-52.021,65.024) v1(-50.927,65.024) ; v1(-22.606,86.995) -21.708,87.893 cw(c-21.45,87.635) CON301.B1A12@-21.45,88
  Bottom Layer w0.203: v2(-56.097,59.33) v2(-55.319,58.552) v2(-54.542,57.774) v2(-53.764,56.996) ; v2(-55.319,60.108) v2(-52.986,57.774) ; v2(-52.986,56.219) v2(-53.764,56.996) ; v2(-52.986,62.441) v2(-52.208,61.663) v2(-51.43,60.885) v2(-50.653,60.108) ; v2(-52.208,56.996) v2(-52.986,57.774) ; v2(-49.875,59.33) v2(-50.653,60.108) ; v2(-53.764,56.996) v2(-52.986,57.774) ; v2(-52.986,57.774) v2(-52.208,58.552) v2(-50.653,60.108)
  other v1: -163.962,15.438 -210.317,16.835 -18.42,16.835 -114.432,16.962 -66.299,16.962 -258.826,17.145 -123.703,17.597 -27.564,17.597 -219.075,17.78 -267.716,17.907 -171.577,17.907 -76.2,17.907 -260.096,24.003 -31.242,39.37 -33.02,42.799 -29.083,43.434 -52.705,49.149 -65.786,50.165 -268.478,52.578 -38.1,52.578 -58.42,52.705 -25.4,53.086 -185.801,53.721 -56.515,54.483 -38.608,54.61 -48.514,54.737 -34.798,55.245 -31.242,55.753 -45.339,56.896 -66.675,57.023 -62.865,57.531 -42.037,57.912 -35.179,57.912 -46.101,59.436 -27.125,61.102 -58.674,61.595 -62.23,62.103 -46.101,62.103 -70.739,62.992 -54.737,65.405 -47.879,65.913 -67.691,66.04 -49.657,67.31 -55.88,67.945 -47.625,67.945 -51.054,69.088 -49.784,69.977 -47.752,69.977 -46.228,72.39 -32.004,72.517 -41.021,72.898 -49.657,73.279 -34.798,73.279 -18.796,74.168 -51.054,74.295 -45.974,74.295 -258.323,74.366 -162.438,74.366 -48.133,74.422 -114.554,74.549 -66.675,74.549 -210.693,74.803 -45.339,74.93 -46.863,75.311 -31.877,75.311 -29.083,75.438 -49.911,75.692 -44.069,75.819 -26.035,76.2 -49.403,78.867 -50.927,78.994 -44.196,79.248 -38.481,79.248 -17.907,79.756 -171.709,80.208 -123.576,80.208 -48.133,80.264 -219.334,80.335 -75.443,80.335 -51.054,80.391 -266.959,80.462 -45.212,81.026 -40.386,81.026 -33.147,81.026 -29.21,81.026 -43.053,81.153 -37.211,81.153 -25.273,81.153 -49.53,81.28 -21.844,81.28 -16.256,82.55 -20.955,84.201 -17.272,85.09 -12.954,85.217 -19.558,85.979 -14.097,86.995 -26.924,87.63 -27.686,89.281 -19.558,89.408 -17.399,89.408 -29.21,92.456
  other v2: -51.43,57.774 -53.764,58.552 -50.653,58.552 -54.542,59.33 -52.986,59.33 -51.43,59.33 -53.764,60.108 -52.208,60.108 -54.542,60.885 -52.986,60.885 -53.764,61.663
  other v3: -135.128,87.122
LED: R306.2 R401.1 U301.29 | length 46.1
  Component Side w0.254: U301.29@-49.468,61.787 -48.499,62.756 cw(c-46.703,60.96) -46.703,63.5 -30.226,63.5 ccw(c-30.226,65.463) -28.263,65.463 -28.263,70.951 ccw(c-30.226,70.951) -28.775,72.274 ccw(c-28.963,72.102) -28.962,72.356 v1(-29.117,72.356) ; v1(-22.606,74.041) cw(c-20.335,74.041) -20.335,76.312 R306.2@-15.748,76.312
  Bottom Layer w0.254: v1(-29.117,72.356) ccw(c-28.897,72.356) -28.897,72.136 -24.511,72.136 ccw(c-24.511,74.041) v1(-22.606,74.041)
NetC306_2: C306.2 F301.1 Q301.3 | length 6.8
  Component Side w0.5: C306.2@-40.147,73.533 -40.147,75.485 F301.1@-39.624,75.485 -38.298,76.811 cw(c-36.502,75.015) -36.502,77.555 Q301.3@-35.998,77.555
NetC309_2: C309.2 Q302.1 R305.1 | length 3.5
  Component Side w0.254: R305.1@-35.799,52.578 cw(c-34.021,52.578) -34.021,54.356 C309.2@-33.289,54.356
NetC311_2: C311.2 CON301.S1 L301.2 | length 22.6
  Component Side w0.5: C311.2@-26.543,90.693 -26.543,91.155 cw(c-24.703,91.155) L301.2@-26.004,92.456 -24.063,92.456 ccw(c-24.063,94.638) CON301.S1@-22.52,93.095
  Bottom Layer w0.5: CON301.S1@-22.52,88.915 CON301.S1@-22.52,93.095 CON301.S1@-13.88,93.095 CON301.S1@-13.88,88.915
NetCON301_A5: CON301.A5 R301.1 | length 4.3
  Component Side w0.254: CON301.A5@-16.95,88 -16.95,86.835 ccw(c-16.696,86.835) -16.802,86.604 cw(c-17.145,85.852) -16.329,85.988 cw(c-17.145,85.852) -16.327,85.733 ccw(c-16.075,85.696) -16.329,85.696 ccw(c-15.342,85.696) -15.342,84.709 R301.1@-15.128,84.709
NetCON301_B5: CON301.B5 R302.1 | length 8.7
  Component Side w0.254: R302.1@-26.924,85.329 v1(-25.69,85.329) ccw(c-25.69,85.38) v1@-25.654,85.344 ; v1(-21.082,85.852) ccw(c-21.082,86.984) -19.95,86.984 CON301.B5@-19.95,87.782
  Bottom Layer w0.254: v1(-25.69,85.329) -22.875,85.329 ccw(c-22.875,85.583) -22.696,85.403 -22.486,85.613 ccw(c-22.666,85.792) -22.474,85.626 cw(c-21.844,85.09) -21.561,85.867 ccw(c-21.475,86.106) -21.476,85.852 v1(-21.082,85.852)
NetD201_1: D201.1 S201.1 | length 27.4
  Component Side w0.254: D201.1@-25.019,87.05 -25.019,88.773 cw(c-22.479,88.773) -22.479,91.313 -14.097,91.313 cw(c-14.097,88.773) -11.557,88.773 -11.557,83.441 ccw(c-9.031,83.441) S201.1@-9.031,80.915
NetD202_1: D202.1 S202.1 | length 8.7
  Component Side w0.254: D202.1@-42.418,87.05 -42.418,87.375 cw(c-39.878,87.375) -39.878,89.915 S202.1@-35.462,89.915
NetD203_1: D203.1 S203.2 | length 7.5
  Component Side w0.254: D203.1@-60.198,87.05 -60.198,87.375 cw(c-57.658,87.375) -57.658,89.915 S203.2@-54.512,89.915
NetD204_1: D204.1 S204.1 | length 7.3
  Component Side w0.254: S204.1@-68.562,89.415 -64.976,89.415 cw(c-64.976,87.05) -62.83,88.045 cw(c-64.976,87.05) D204.1@-62.611,87.05
NetD205_1: D205.1 S205.2 | length 8.9
  Component Side w0.254: D205.1@-99.695,87.05 -99.695,87.375 cw(c-97.155,87.375) -97.155,89.915 S205.2@-92.612,89.915
NetD206_1: D206.1 S206.1 | length 8.7
  Component Side w0.254: D206.1@-118.618,87.05 -118.618,87.375 cw(c-116.078,87.375) -116.078,89.915 S206.1@-111.662,89.915
NetD207_1: D207.1 S207.2 | length 8.7
  Component Side w0.254: D207.1@-137.668,87.05 -137.668,87.375 cw(c-135.128,87.375) -135.128,89.915 S207.2@-130.712,89.915
NetD208_1: D208.1 S208.1 | length 8.9
  Component Side w0.254: D208.1@-156.845,87.05 -156.845,87.375 cw(c-154.305,87.375) -154.305,89.915 S208.1@-149.762,89.915
NetD209_1: D209.1 S209.2 | length 8.7
  Component Side w0.254: D209.1@-175.768,87.05 -175.768,87.375 cw(c-173.228,87.375) -173.228,89.915 S209.2@-168.812,89.915
NetD210_1: D210.1 S210.1 | length 32.6
  Component Side w0.254: D210.1@-215.138,87.05 -215.138,90.043 cw(c-212.598,90.043) -212.598,92.583 -201.695,92.583 cw(c-201.695,90.043) -199.899,91.839 -198.55,90.491 ccw(c-196.94,92.455) -196.94,89.915 S210.1@-187.92,89.915
NetD211_1: D211.1 S211.2 | length 7.6
  Component Side w0.254: D211.1@-212.725,87.05 -212.725,87.375 cw(c-210.185,87.375) -210.185,89.915 S211.2@-206.912,89.915
NetD212_1: D212.1 S212.1 | length 8.7
  Component Side w0.254: D212.1@-232.918,87.05 -232.918,87.375 cw(c-230.378,87.375) -230.378,89.915 S212.1@-225.962,89.915
NetD213_1: D213.1 S213.2 | length 8.9
  Component Side w0.254: D213.1@-252.095,87.05 -252.095,87.375 cw(c-249.555,87.375) -249.555,89.915 S213.2@-245.012,89.915
NetD214_1: D214.1 S214.1 | length 9.2
  Component Side w0.254: D214.1@-278.638,87.05 -278.638,87.375 cw(c-276.098,87.375) -276.098,89.915 S214.1@-271.192,89.915
NetD215_1: D215.1 S215.2 | length 16.6
  Component Side w0.254: v1@-31.496,67.056 D215.1@-31.496,68
  Bottom Layer w0.254: v1(-31.496,66.802) -31.496,68.325 cw(c-28.956,68.325) -28.956,70.865 S215.2@-18.793,70.865
NetD216_1: D216.1 S216.1 | length 7.2
  Component Side w0.254: S216.1@-39.987,70.365 -36.528,70.365 cw(c-36.528,68) D216.1@-34.163,68
NetD217_1: D217.1 S217.2 | length 8.7
  Component Side w0.254: D217.1@-70.993,68 -70.993,68.325 cw(c-68.453,68.325) -68.453,70.865 S217.2@-64.037,70.865
NetD218_1: D218.1 S218.1 | length 8.7
  Component Side w0.254: D218.1@-90.043,68 -90.043,68.325 cw(c-87.503,68.325) -87.503,70.865 S218.1@-83.087,70.865
NetD219_1: D219.1 S219.2 | length 7.5
  Component Side w0.254: D219.1@-107.823,68 -107.823,68.325 cw(c-105.283,68.325) -105.283,70.865 S219.2@-102.137,70.865
NetD220_1: D220.1 S220.1 | length 7.2
  Component Side w0.254: S220.1@-116.187,70.365 -112.728,70.365 cw(c-112.728,68) D220.1@-110.363,68
NetD221_1: D221.1 S221.2 | length 7.7
  Component Side w0.254: D221.1@-146.177,68 -146.177,68.325 cw(c-143.637,68.325) -143.637,70.865 S221.2@-140.237,70.865
NetD222_1: D222.1 S222.1 | length 6.9
  Component Side w0.254: S222.1@-154.287,70.365 -151.082,70.365 cw(c-151.082,68) D222.1@-148.717,68
NetD223_1: D223.1 S223.2 | length 8.9
  Component Side w0.254: D223.1@-185.42,68 -185.42,68.325 cw(c-182.88,68.325) -182.88,70.865 S223.2@-178.337,70.865
NetD224_1: D224.1 S224.1 | length 8.7
  Component Side w0.254: D224.1@-204.343,68 -204.343,68.325 cw(c-201.803,68.325) -201.803,70.865 S224.1@-197.387,70.865
NetD225_1: D225.1 S225.2 | length 8.7
  Component Side w0.254: D225.1@-223.393,68 -223.393,68.325 cw(c-220.853,68.325) -220.853,70.865 S225.2@-216.437,70.865
NetD226_1: D226.1 S226.1 | length 6.3
  Component Side w0.254: D226.1@-240.03,68 -240.03,68.325 cw(c-237.49,68.325) -237.49,70.865 S226.1@-235.487,70.865
NetD227_1: D227.1 S227.1 | length 8.4
  Component Side w0.254: S227.1@-249.537,70.365 -244.808,70.365 cw(c-244.808,68) D227.1@-242.443,68
NetD228_1: D228.1 S228.1 | length 34.1
  Component Side w0.254: S228.1@-271.361,59.345 -271.361,65.46 cw(c-268.821,65.46) -268.821,68 D228.1@-244.856,68
NetD229_1: D229.1 S229.2 | length 21.1
  Component Side w0.254: D229.1@-36.449,48.95 -36.449,48.895 ccw(c-33.909,48.895) v1@-33.909,46.355
  Bottom Layer w0.254: v1@-33.909,46.355 -23.715,46.355 ccw(c-23.715,48.895) -21.175,48.895 S229.2@-21.175,51.815
  other v1: -34.036,46.101
NetD230_1: D230.1 S230.1 | length 7.2
  Component Side w0.254: S230.1@-44.75,51.315 -41.227,51.315 cw(c-41.227,48.95) D230.1@-38.862,48.95
NetD231_1: D231.1 S231.2 | length 8.9
  Component Side w0.254: D231.1@-75.946,48.95 -75.946,49.275 cw(c-73.406,49.275) -73.406,51.815 S231.2@-68.8,51.815
NetD232_1: D232.1 S232.1 | length 8.8
  Component Side w0.254: D232.1@-94.869,48.95 -94.869,49.275 cw(c-92.329,49.275) -92.329,51.815 S232.1@-87.85,51.815
NetD233_1: D233.1 S233.2 | length 7.4
  Component Side w0.254: D233.1@-112.522,48.95 -112.522,49.275 cw(c-109.982,49.275) -109.982,51.815 S233.2@-106.9,51.815
NetD234_1: D234.1 S234.2 | length 7
  Component Side w0.254: S234.2@-120.95,51.315 -117.681,51.315 cw(c-117.681,48.95) D234.1@-115.316,48.95
NetD235_1: D235.1 S235.1 | length 26.6
  Component Side w0.254: D235.1@-169.799,48.95 -147.54,48.95 ccw(c-147.54,51.49) -145,51.49 S235.1@-145,51.815
NetD236_1: D236.1 S236.2 | length 10.1
  Component Side w0.254: D236.1@-172.339,48.95 -172.339,49.275 cw(c-169.799,49.275) -169.799,51.815 S236.2@-164.05,51.815
NetD237_1: D237.1 S237.1 | length 8.8
  Component Side w0.254: D237.1@-190.119,48.95 -190.119,49.275 cw(c-187.579,49.275) -187.579,51.815 S237.1@-183.1,51.815
NetD238_1: D238.1 S238.1 | length 8.8
  Component Side w0.254: D238.1@-209.169,48.95 -209.169,49.275 cw(c-206.629,49.275) -206.629,51.815 S238.1@-202.15,51.815
NetD239_1: D239.1 S239.2 | length 8.8
  Component Side w0.254: D239.1@-228.219,48.95 -228.219,49.275 cw(c-225.679,49.275) -225.679,51.815 S239.2@-221.2,51.815
NetD240_1: D240.1 S240.1 | length 8.8
  Component Side w0.254: D240.1@-247.269,48.95 -247.269,49.275 cw(c-244.729,49.275) -244.729,51.815 S240.1@-240.25,51.815
NetD241_1: D241.1 S241.2 | length 8.8
  Component Side w0.254: D241.1@-266.319,48.95 -266.319,49.275 cw(c-263.779,49.275) -263.779,51.815 S241.2@-259.3,51.815
NetD242_1: D242.1 S242.2 | length 13.4
  Component Side w0.254: D242.1@-28.067,29.9 -28.067,30.225 cw(c-25.527,30.225) -25.527,32.765 S242.2@-16.412,32.765
NetD243_1: D243.1 S243.1 | length 8.9
  Component Side w0.254: D243.1@-47.371,29.9 -47.371,30.225 cw(c-44.831,30.225) -44.831,32.765 S243.1@-40.225,32.765
NetD244_1: D244.1 S244.1 | length 8.7
  Component Side w0.254: D244.1@-66.167,29.9 -66.167,30.225 cw(c-63.627,30.225) -63.627,32.765 S244.1@-59.275,32.765
NetD245_1: D245.1 S245.2 | length 8.8
  Component Side w0.254: D245.1@-85.344,29.9 -85.344,30.225 cw(c-82.804,30.225) -82.804,32.765 S245.2@-78.325,32.765
NetD246_1: D246.1 S246.1 | length 8.8
  Component Side w0.254: D246.1@-104.394,29.9 -104.394,30.225 cw(c-101.854,30.225) -101.854,32.765 S246.1@-97.375,32.765
NetD247_1: D247.1 S247.2 | length 8.8
  Component Side w0.254: D247.1@-123.444,29.9 -123.444,30.225 cw(c-120.904,30.225) -120.904,32.765 S247.2@-116.425,32.765
NetD248_1: D248.1 S248.1 | length 8.8
  Component Side w0.254: D248.1@-142.494,29.9 -142.494,30.225 cw(c-139.954,30.225) -139.954,32.765 S248.1@-135.475,32.765
NetD249_1: D249.1 S249.1 | length 8.7
  Component Side w0.254: D249.1@-161.417,29.9 -161.417,30.225 cw(c-158.877,30.225) -158.877,32.765 S249.1@-154.525,32.765
NetD250_1: D250.1 S250.1 | length 8.8
  Component Side w0.254: D250.1@-180.594,29.9 -180.594,30.225 cw(c-178.054,30.225) -178.054,32.765 S250.1@-173.575,32.765
NetD251_1: D251.1 S251.1 | length 8.8
  Component Side w0.254: D251.1@-199.644,29.9 -199.644,30.225 cw(c-197.104,30.225) -197.104,32.765 S251.1@-192.625,32.765
NetD252_1: D252.1 S252.1 | length 8.7
  Component Side w0.254: D252.1@-218.567,29.9 -218.567,30.225 cw(c-216.027,30.225) -216.027,32.765 S252.1@-211.675,32.765
NetD253_1: D253.1 S253.2 | length 8.8
  Component Side w0.254: D253.1@-237.744,29.9 -237.744,30.225 cw(c-235.204,30.225) -235.204,32.765 S253.2@-230.725,32.765
NetD254_1: D254.1 S254.1 | length 24
  Component Side w0.254: D254.1@-267.462,29.9 -267.462,30.345 cw(c-264.922,30.345) -264.922,32.885 S254.1@-264.08,32.885 -264.08,33.274 cw(c-261.54,33.274) -261.54,35.814 -252.095,35.814 cw(c-252.095,33.274) -249.555,33.274 S254.1@-249.555,32.385
NetD255_1: D255.1 S255.1 | length 4.8
  Component Side w0.254: S255.1@-273.35,32.385 -272.487,32.385 cw(c-272.487,29.9) D255.1@-270.002,29.9
NetD256_1: D256.1 S256.2 | length 6.5
  Component Side w0.254: S256.2@-11.412,13.215 -8.588,13.215 cw(c-8.588,10.85) D256.1@-6.223,10.85
NetD257_1: D257.1 S257.2 | length 8.3
  Component Side w0.254: D257.1@-49.149,10.85 -49.149,11.175 cw(c-46.609,11.175) -46.609,13.715 S257.2@-42.606,13.715
NetD258_1: D258.1 S258.1 | length 21.5
  Component Side w0.254: D258.1@-74.549,10.85 -74.549,11.175 cw(c-72.009,11.175) -72.009,13.715 S258.1@-68.799,13.715 -68.799,12.827 ccw(c-66.259,12.827) -66.259,10.287 -61.577,10.287 ccw(c-61.577,12.827) -59.037,12.827 S258.1@-59.037,13.215
NetD259_1: D259.1 S259.2 | length 28.4
  Component Side w0.254: D259.1@-113.284,10.85 -113.284,11.175 cw(c-110.744,11.175) -110.744,13.715 S259.2@-109.281,13.715 -109.281,13.462 ccw(c-106.741,13.462) -106.741,10.922 -101.811,10.922 ccw(c-101.811,13.215) S259.2@-99.518,13.215
  Bottom Layer w0.254: S259.2@-101.899,4.715 -101.899,10.834 cw(c-99.518,10.834) S259.2@-99.518,13.215
NetD260_1: D260.1 S260.2 | length 30
  Component Side w0.254: D260.1@-150.114,10.85 -150.114,11.175 cw(c-147.574,11.175) -147.574,13.715 S260.2@-144.999,13.715 -144.999,13.462 ccw(c-142.459,13.462) -142.459,10.922 -137.545,10.922 ccw(c-137.545,13.215) S260.2@-135.252,13.215 S260.2@-135.252,13.716
  Bottom Layer w0.254: S260.2@-137.641,4.715 -137.641,10.826 cw(c-135.252,10.826) S260.2@-135.252,13.215
NetD261_1: D261.1 S261.1 | length 6.6
  Component Side w0.254: S261.1@-175.718,13.215 -172.799,13.215 cw(c-172.799,10.85) D261.1@-170.434,10.85
NetD262_1: D262.1 S262.1 | length 21.2
  Component Side w0.254: D262.1@-232.41,10.85 -232.41,11.175 cw(c-229.87,11.175) -229.87,13.715 S262.1@-225.962,13.715 -225.962,13.335 ccw(c-223.422,13.335) -223.422,10.795 -218.619,10.795 ccw(c-218.619,13.215) S262.1@-216.199,13.215
NetD263_1: D263.1 S263.1 | length 8.8
  Component Side w0.254: S263.1@-242.393,13.215 -237.315,13.215 cw(c-237.315,10.85) D263.1@-234.95,10.85
NetD264_1: D264.1 S264.1 | length 7.7
  Component Side w0.254: D264.1@-279.527,10.85 -279.527,11.175 cw(c-276.987,11.175) -276.987,13.715 S264.1@-273.587,13.715